# EAGLE board Arduino Nano SD Serayu 2024 (EAGLE 9.6.2)
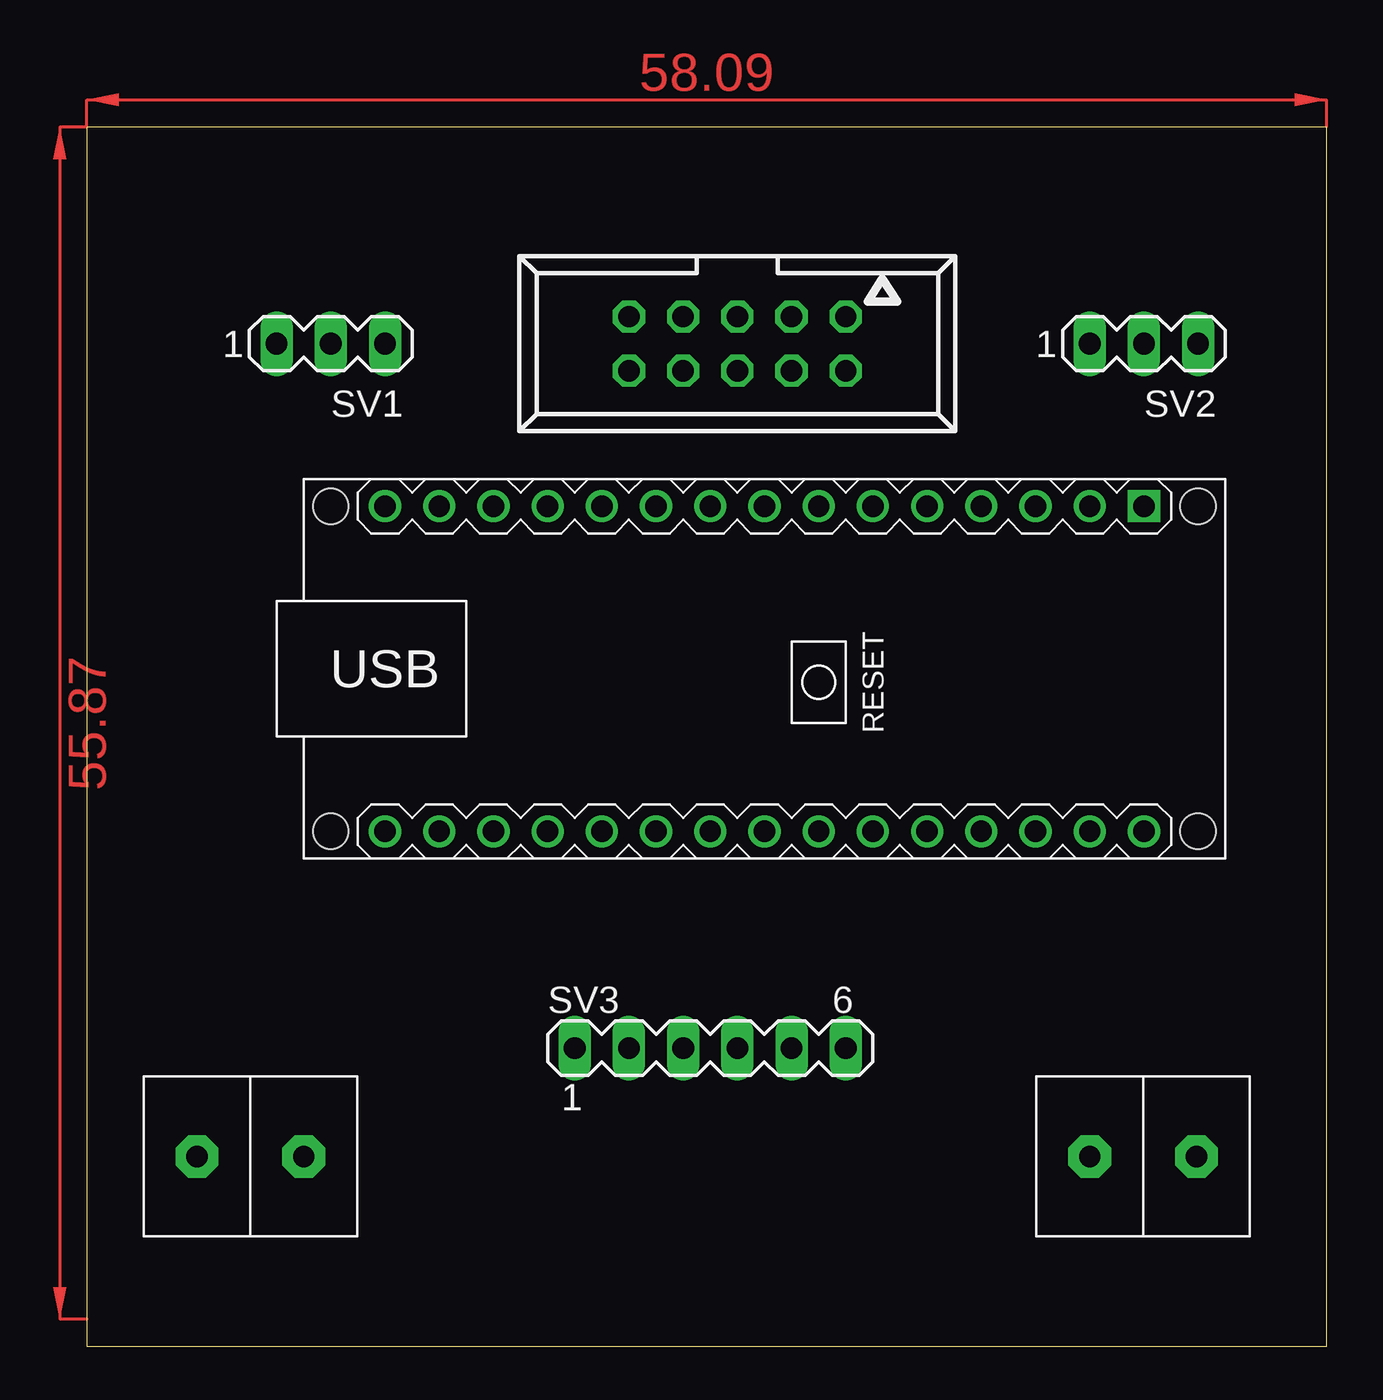
[diagram p0: board, top side]
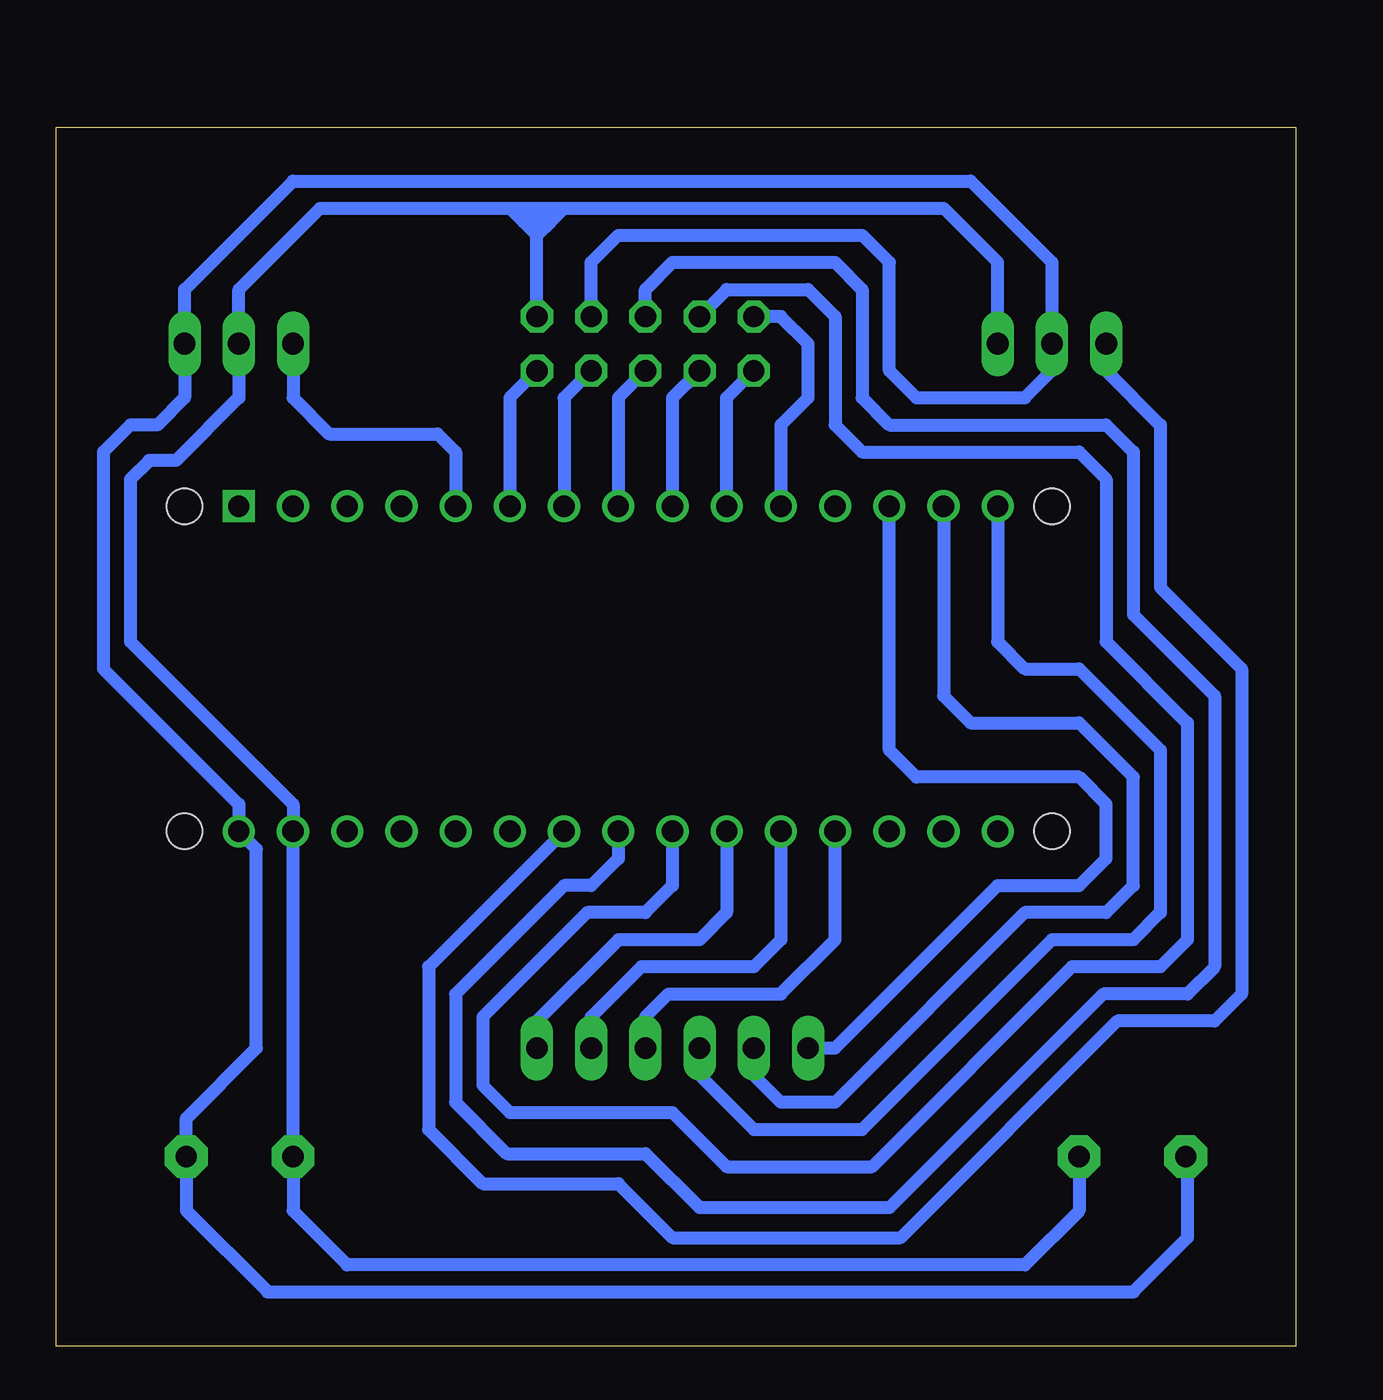
[diagram p1: board, bottom side, seen from below]

Size 58.09 x 57.14 mm. Coordinates in mm from the lower left corner, seen from the top.
Outline: 0,0 58.09,0 58.09,57.14 0,57.14 0,0
Copper layers (1*16): Top 0.035mm / dielectric 1.5mm / Bottom 0.035mm
Design rules "default": minimum track width 6mil, minimum drill 0.35mm, track to track 6mil, track to pad 6mil, pad to pad 6mil, via to via 6mil, smd to smd 6mil, copper to edge 40mil, drill to drill 6mil, minimum pad ring 10mil, minimum via ring 8mil, stop-mask expansion 4mil, vias tented up to drill 0mil, thermal gap 10mil

## Footprints (pad centres in the part's own frame; a part is rotated, then mirrored left to right if it is on the bottom)
ARDUINO-NANO-3.0 = drill 1 square: J1.1 17.78,7.62 | drill 1: J1.2 15.24,7.62; J1.3 12.7,7.62; J1.4 10.16,7.62; J1.5 7.62,7.62; J1.6 5.08,7.62; J1.7 2.54,7.62; J1.8 0,7.62; J1.9 -2.54,7.62; J1.10 -5.08,7.62; J1.11 -7.62,7.62; J1.12 -10.16,7.62; J1.13 -12.7,7.62; J1.14 -15.24,7.62; J1.15 -17.78,7.62; J2.1 17.78,-7.62; J2.2 15.24,-7.62; J2.3 12.7,-7.62; J2.4 10.16,-7.62; J2.5 7.62,-7.62; J2.6 5.08,-7.62; J2.7 2.54,-7.62; J2.8 0,-7.62; J2.9 -2.54,-7.62; J2.10 -5.08,-7.62; J2.11 -7.62,-7.62; J2.12 -10.16,-7.62; J2.13 -12.7,-7.62; J2.14 -15.24,-7.62; J2.15 -17.78,-7.62 | hole 1.651: -20.32,7.62; -20.32,-7.62; 20.32,-7.62; 20.32,7.62
MA03-1 = drill 1.016 long: 1 -2.54,0; 2 0,0; 3 2.54,0
MA06-1 = drill 1.016 long: 1 -6.35,0; 2 -3.81,0; 3 -1.27,0; 4 1.27,0; 5 3.81,0; 6 6.35,0
DBCONN-1X2 = drill 1 pad 2 octagon: P0 -2.54,0; P1 2.46,0
057-010-1 = drill 1 octagon: 1 -5.08,-1.27; 2 -5.08,1.27; 3 -2.54,-1.27; 4 -2.54,1.27; 5 0,-1.27; 6 0,1.27; 7 2.54,-1.27; 8 2.54,1.27; 9 5.08,-1.27; 10 5.08,1.27

## Placement (x,y rotation side)
M2  ARDUINO-NANO-3.0  [ARDUINO-NANO-3.0]  31.75,31.75 0 top
SV1  [MA03-1]  11.43,46.99 0 top
SV2  [MA03-1]  49.53,46.99 0 top
SV3  [MA06-1]  29.21,13.97 0 top
U$1  DBCONN-1X2  [DBCONN-1X2]  49.53,8.89 0 top
U$2  DBCONN-1X2  [DBCONN-1X2]  7.62,8.89 180 top
X1  057-010-1  [057-010-1]  30.48,46.99 180 top

## Library data of the parts
M2 = diy-modules
SV1-SV3 = con-lstb; OC_FARNELL: unknown; OC_NEWARK: unknown
U$1 U$2 = Terminal Block Connector
X1 = con-panduit; OC_FARNELL: unknown; OC_NEWARK: unknown

## Nets
3V3: M2.J2.14
5V: M2.J2.4
A3: M2.J2.9 X1.7
A4: M2.J2.8 X1.5
A6: M2.J2.6
D0: M2.J1.2
D1: M2.J1.1
D2: M2.J1.5 SV2.1
D3: M2.J1.6 X1.2
D4: M2.J1.7 X1.4
D5: M2.J1.8 X1.6
D6: M2.J1.9 X1.8
D7: M2.J1.10 X1.10
D8: M2.J1.11 X1.9
D9: M2.J1.12
D10: M2.J1.13 SV3.1
D11: M2.J1.14 SV3.2
D12: M2.J1.15 SV3.3
D14: M2.J2.12 SV3.4
D15: M2.J2.11 SV3.5
D16: M2.J2.10 SV3.6
D19: M2.J2.7 SV1.1
GND: M2.J2.2 SV1.3 SV2.2 U$1.P0 U$2.P0 X1.1
GND.1: M2.J1.4
VCC: M2.J2.1 SV1.2 SV2.3 U$1.P1 U$2.P1 X1.3

## Tracks (layer width: path | path; a pad name or v marks a point on that pad's centre or on a via)
A3
  Bottom 0.61: X1.7 26.67,49.53 22.86,49.53 21.59,48.26 21.59,43.18 20.32,41.91 10.16,41.91 8.89,40.64 8.89,33.02 5.08,29.21 5.08,19.05 6.35,17.78 10.5,17.78 19.86,8.42 26.67,8.42 29.21,10.96 36.83,10.96 38.1,12.23 38.1,15.43 33.21,20.32 30.48,20.32 29.21,21.59 M2.J2.9
A4
  Bottom 0.61: X1.5 30.48,49.53 29.21,50.8 21.59,50.8 20.32,49.53 20.32,44.45 19.05,43.18 8.89,43.18 7.62,41.91 7.62,34.29 3.81,30.48 3.81,17.78 5.08,16.51 9.03,16.51 19.05,6.49 27.94,6.49 30.48,9.03 36.97,9.03 39.37,11.43 39.37,16.51 34.29,21.59 33.02,21.59 31.75,22.86 M2.J2.8
D2
  Bottom 0.61: M2.J1.5 39.37,41.91 40.22,42.76 45.3,42.76 46.99,44.45 SV2.1
D3
  Bottom 0.61: X1.2 36.83,44.45 M2.J1.6
D4
  Bottom 0.61: X1.4 34.29,44.45 M2.J1.7
D5
  Bottom 0.61: X1.6 31.75,44.45 M2.J1.8
D6
  Bottom 0.61: M2.J1.9 29.21,44.45 X1.8
D7
  Bottom 0.61: M2.J1.10 26.67,44.45 X1.10
D8
  Bottom 0.61: M2.J1.11 24.13,43.18 22.86,44.45 22.86,46.99 24.13,48.26 X1.9
D10
  Bottom 0.61: M2.J1.13 19.05,27.94 17.78,26.67 10.16,26.67 8.89,25.4 8.89,22.86 10.16,21.59 13.97,21.59 21.59,13.97 SV3.1
D11
  Bottom 0.508: 25.4,12.7 SV3.2
  Bottom 0.61: M2.J1.14 16.51,30.48 15.24,29.21 10.16,29.21 7.62,26.67 7.62,21.59 8.89,20.32 12.7,20.32 21.59,11.43 24.13,11.43 25.4,12.7
D12
  Bottom 0.61: M2.J1.15 13.97,33.02 12.7,31.75 10.16,31.75 6.35,27.94 6.35,20.32 7.62,19.05 11.43,19.05 20.32,10.16 25.4,10.16 27.94,12.7 SV3.3
D14
  Bottom 0.61: SV3.4 30.48,15.43 29.4,16.51 24.13,16.51 21.59,19.05 M2.J2.12
D15
  Bottom 0.61: SV3.5 33.02,15.43 30.67,17.78 25.4,17.78 24.13,19.05 M2.J2.11
D16
  Bottom 0.61: SV3.6 35.56,15.24 31.75,19.05 27.94,19.05 26.67,20.32 M2.J2.10
D19
  Bottom 0.61: SV1.1 8.89,45.72 6.35,43.18 6.35,35.56 2.54,31.75 2.54,16.51 3.81,15.24 8.37,15.24 18.53,5.08 29.21,5.08 31.75,7.62 38.1,7.62 40.64,10.16 40.64,17.78 M2.J2.7
GND
  Bottom 0.61: 35.56,53.34 34.29,53.34 | 34.29,53.34 16.51,53.34 13.97,50.8 SV1.3 | X1.1 35.56,52.07 | 35.56,52.07 35.56,53.34 | 35.56,52.07 36.2,52.71 | 36.2,52.71 36.83,53.34 | 34.29,53.34 34.92,52.71 | 34.92,52.71 35.56,52.07 | 34.92,52.71 35.56,53.34 | 36.83,53.34 35.56,53.34 | 36.2,52.71 35.56,53.34 | U$2.P0 10.16,6.35 12.7,3.81 44.45,3.81 46.99,6.35 U$1.P0 M2.J2.2 46.99,25.4 54.61,33.02 54.61,40.64 53.73,41.52 52.46,41.52 49.53,44.45 SV2.2 49.53,49.53 45.72,53.34 36.83,53.34
VCC
  Bottom 0.508: M2.J2.1 49.49,24.09 | U$2.P1 5.08,8.81
  Bottom 0.61: X1.3 33.02,50.8 31.75,52.07 20.32,52.07 19.05,50.8 19.05,45.72 17.78,44.45 12.7,44.45 11.43,45.72 SV1.2 11.43,50.8 15.24,54.61 46.99,54.61 52.07,49.53 SV2.3 52.07,44.45 53.34,43.18 54.61,43.18 55.88,41.91 55.88,31.75 49.53,25.4 M2.J2.1 48.7,23.3 48.7,13.97 51.99,10.68 U$1.P1 51.99,6.35 48.18,2.54 7.62,2.54 5.08,5.08 5.08,8.81
(copper drawn outside any net)
  shapes: Top area x2